# EAGLE board avoccado-avr-pcb-yolandi-panel (EAGLE 7.2.0), part 1 of 8
Avoccado-avr-yolandi Yolandi is the minified version of Avoccado-avr with less pins broken out and a footprint of less than one square inch for the PCB without peripherals.
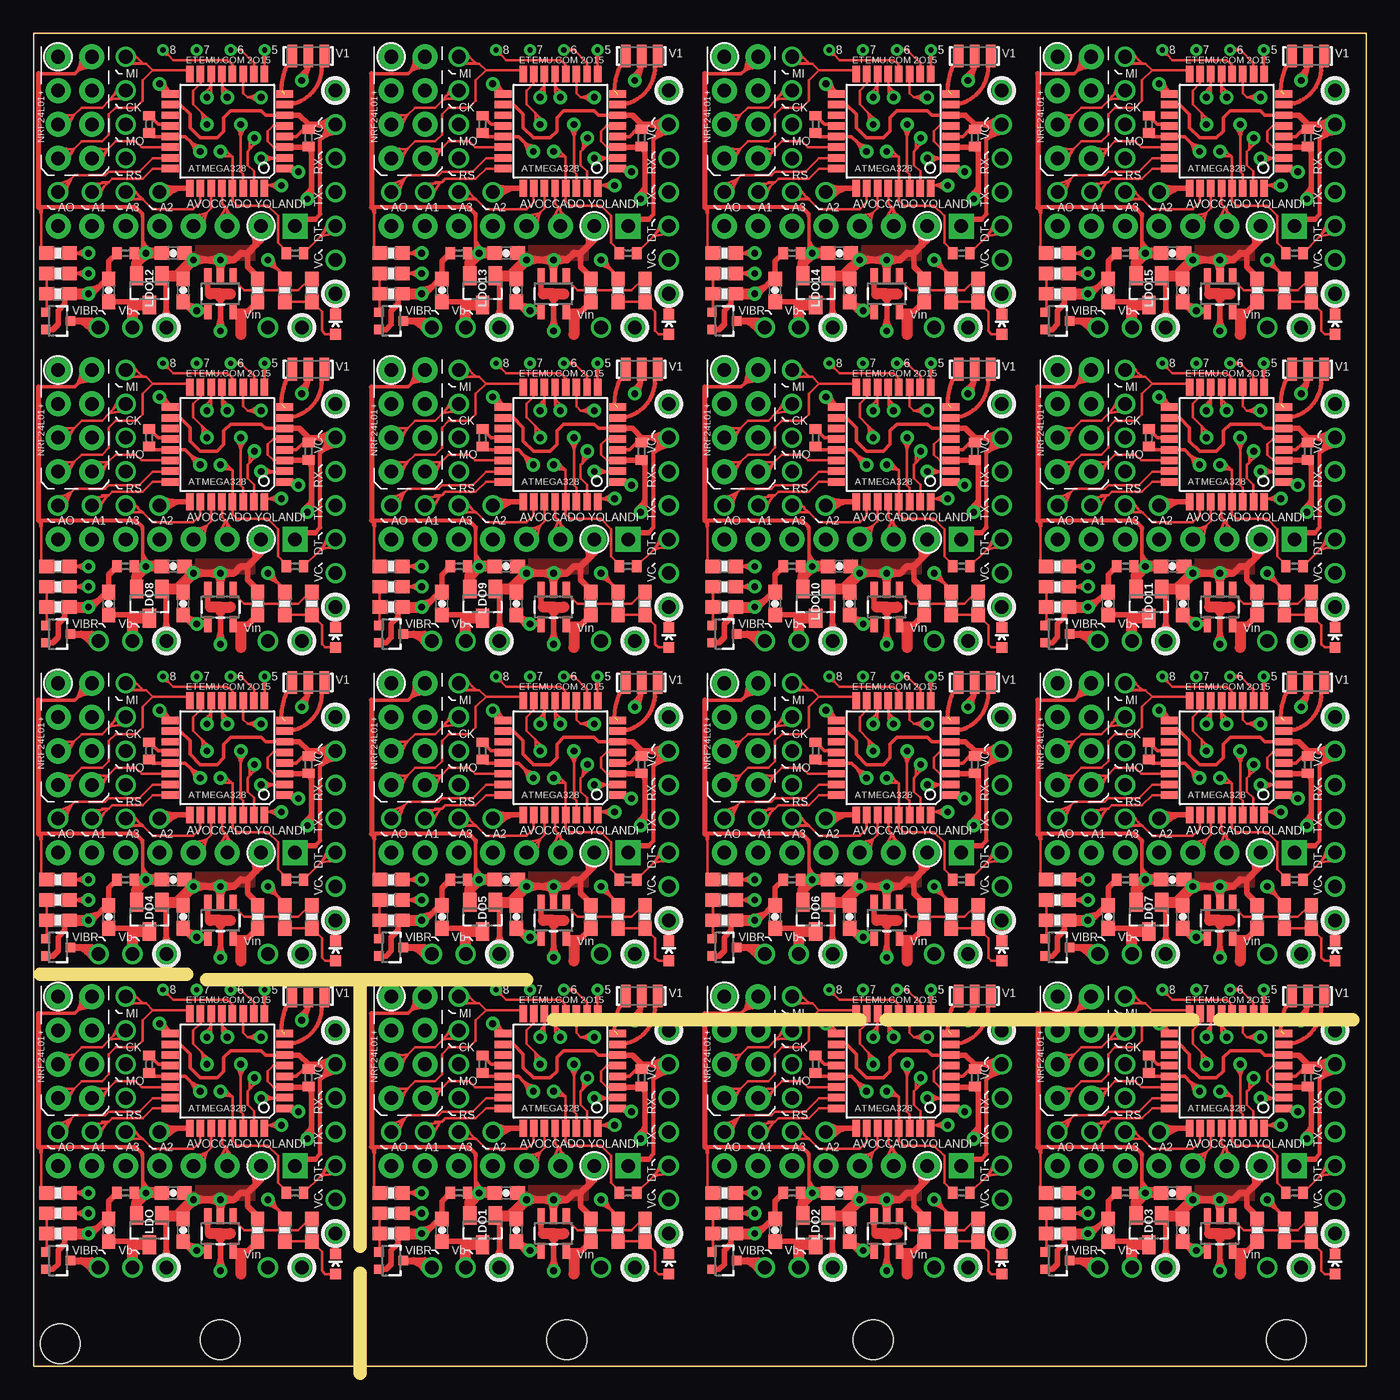
[diagram p0: board, top side]
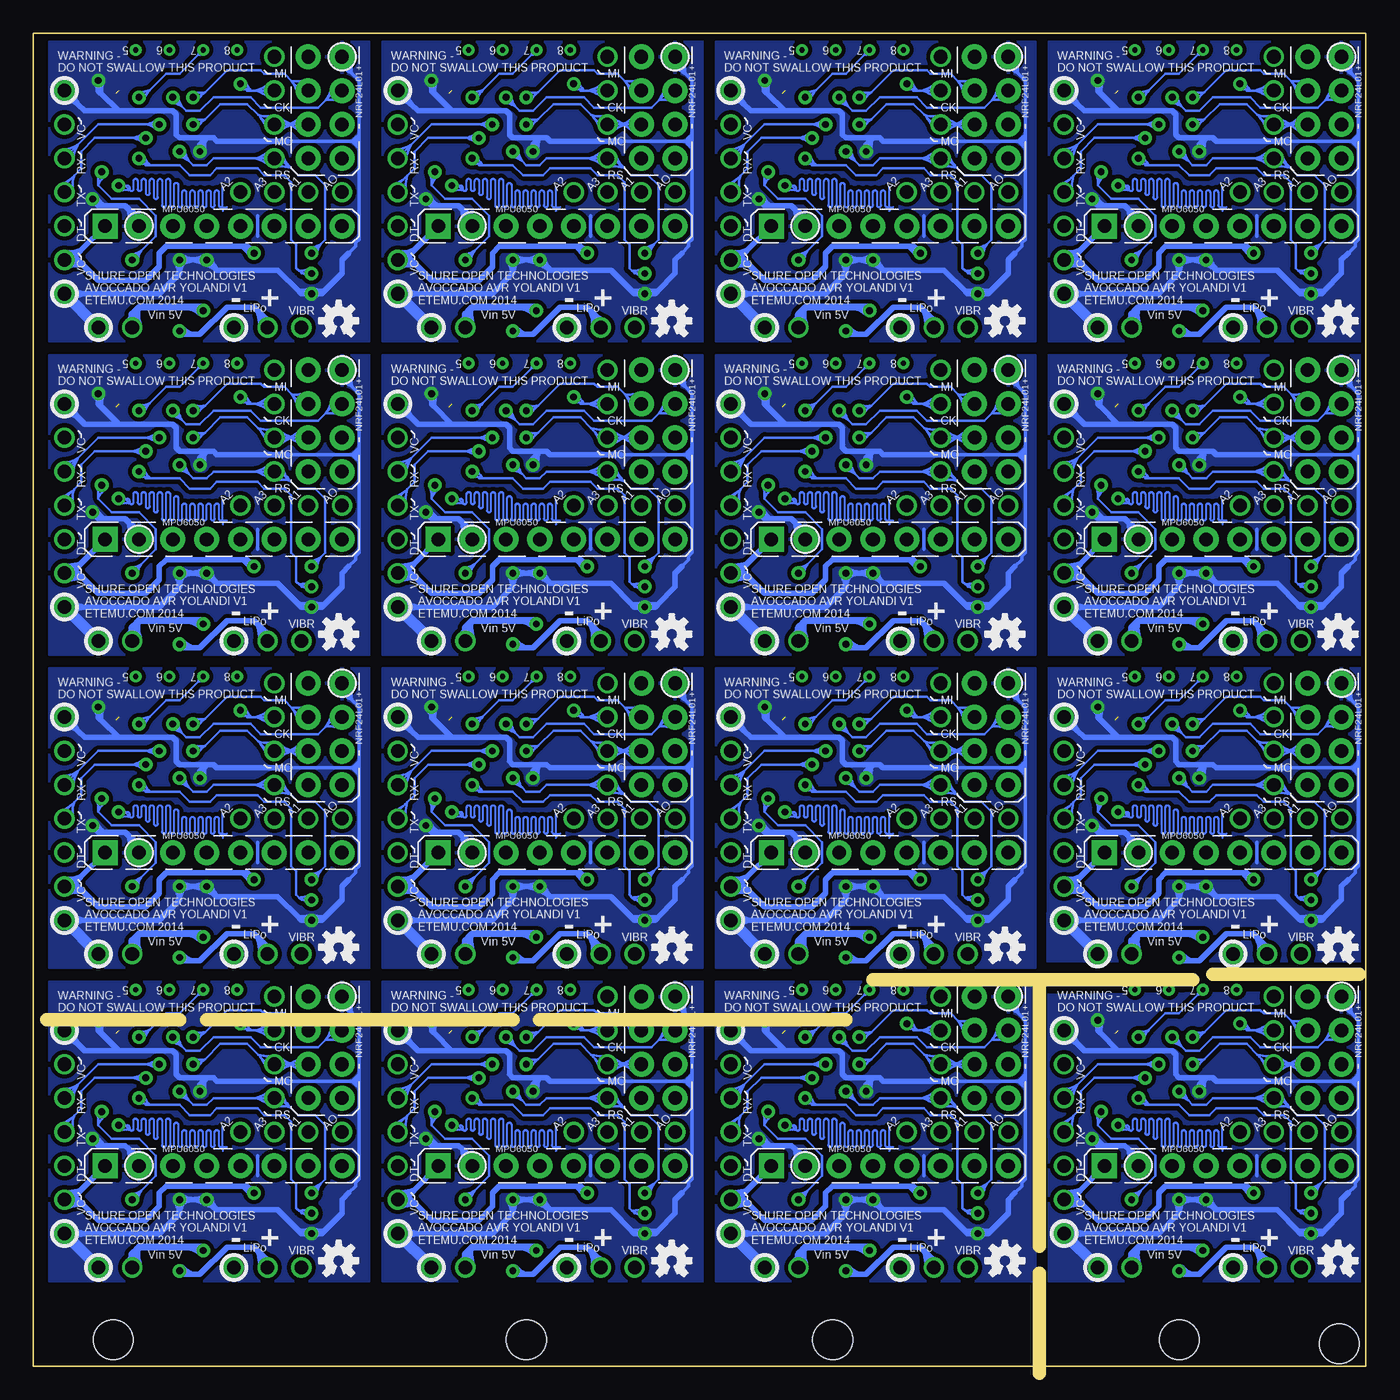
[diagram p1: board, bottom side, seen from below]

Size 100 x 100 mm. Coordinates in mm from the lower left corner, seen from the top.
Outline: 0,0 0,100 100,100 100,0 0,0
Copper layers (1*16): Top 0.035mm / dielectric 1.5mm / Bottom 0.035mm
Design rules "dirt_cheap_dirty_boards.v1 *": minimum track width 5mil, minimum drill 12mil, track to track 5mil, track to pad 5mil, pad to pad 5mil, via to via 5mil, smd to smd 0mil, copper to edge 10mil, drill to drill 10mil, minimum pad ring 10mil, minimum via ring 6mil, stop-mask expansion 0mil, vias tented up to drill 25mil, thermal gap 10mil
Net classes: 1 vcc: width 0.254 mm; 3 usbvcc: width 0.203 mm, drill 0.61 mm, clearance 0.152 mm
Holes 3 mm at 2,1.7 14,2 40,2 63,2 94,2
Milling: 8 lines

## Footprints (pad centres in the part's own frame; a part is rotated, then mirrored left to right if it is on the bottom)
TQFP32-08 = smd 1.27 x 0.559: 1 -4.293,2.8; 2 -4.293,2; 3 -4.293,1.2; 4 -4.293,0.4; 5 -4.293,-0.4; 6 -4.293,-1.2; 7 -4.293,-2; 8 -4.293,-2.8; 17 4.293,-2.8; 18 4.293,-2; 19 4.293,-1.2; 20 4.293,-0.4; 21 4.293,0.4; 22 4.293,1.2; 23 4.293,2; 24 4.293,2.8 | smd 0.559 x 1.27: 9 -2.8,-4.293; 10 -2,-4.293; 11 -1.2,-4.293; 12 -0.4,-4.293; 13 0.4,-4.293; 14 1.2,-4.293; 15 2,-4.293; 16 2.8,-4.293; 25 2.8,4.293; 26 2,4.293; 27 1.2,4.293; 28 0.4,4.293; 29 -0.4,4.293; 30 -1.2,4.293; 31 -2,4.293; 32 -2.8,4.293
C0402 = smd 0.7 x 0.9: 1 -0.65,0; 2 0.65,0
0603-CAP = smd 1.1 x 1: 1 -0.85,0; 2 0.85,0
LED-0603 = smd 0.8 x 0.8: A 0,-0.75; C 0,0.75
1X08_PIN1_NO_SILK = drill 1.016 pad 1.88 square: 1 0,0 | drill 1.016 pad 1.88: 2 2.54,0; 3 5.08,0; 4 7.62,0; 5 10.16,0; 6 12.7,0; 7 15.24,0; 8 17.78,0
1X02_NO_SILK = drill 1.016 pad 1.88: 1 0,0; 2 2.54,0
1X01NS-KIT = drill 1.016 pad 1.524: 1 0,0
SOT23 = smd 1 x 1.4: 1 -0.95,-1.1; 2 0.95,-1.1; 3 0,1.1
RESONATOR-SMD = smd 0.7 x 1.7: 1 -1.2,0; 2 0,0; 3 1.2,0
SOT323 = smd 0.7 x 0.7: 1 -0.65,-0.925; 2 0.65,-0.925; 3 0,0.925
0603-RES = smd 1.1 x 1: 1 -0.85,0; 2 0.85,0
TP_15TH = drill 0.381 pad 0.61: P$1 0,0
SOT23-5 = smd 0.55 x 1.2: 1 -0.95,-1.3; 2 0,-1.3; 3 0.95,-1.3; 4 0.95,1.3; 5 -0.95,1.3

## Placement (x,y rotation side)
AVR  ATMEGA328P  [TQFP32-08]  14.53,22.16 180 top
AVR1  ATMEGA328P  [TQFP32-08]  39.53,22.16 180 top
AVR2  ATMEGA328P  [TQFP32-08]  64.53,22.16 180 top
AVR3  ATMEGA328P  [TQFP32-08]  89.53,22.16 180 top
AVR4  ATMEGA328P  [TQFP32-08]  14.53,45.66 180 top
AVR5  ATMEGA328P  [TQFP32-08]  39.53,45.66 180 top
AVR6  ATMEGA328P  [TQFP32-08]  64.53,45.66 180 top
AVR7  ATMEGA328P  [TQFP32-08]  89.53,45.66 180 top
AVR8  ATMEGA328P  [TQFP32-08]  14.53,69.16 180 top
AVR9  ATMEGA328P  [TQFP32-08]  39.53,69.16 180 top
AVR10  ATMEGA328P  [TQFP32-08]  64.53,69.16 180 top
AVR11  ATMEGA328P  [TQFP32-08]  89.53,69.16 180 top
AVR12  ATMEGA328P  [TQFP32-08]  14.53,92.66 180 top
AVR13  ATMEGA328P  [TQFP32-08]  39.53,92.66 180 top
AVR14  ATMEGA328P  [TQFP32-08]  64.53,92.66 180 top
AVR15  ATMEGA328P  [TQFP32-08]  89.53,92.66 180 top
C1  0.1uF  [C0402]  8.69,22.66 90 top
C2  0.1uF  [C0402]  19.61,13.01 0 top
C3  0.1uF  [C0402]  20.63,21.65 90 top
C4  4.7uF  [0603-CAP]  11.23,10.22 90 top
C5  4.7uF  [0603-CAP]  5.64,10.22 90 top
C6  4.7uF  [0603-CAP]  10.47,13.01 0 top
C7  0.1uF  [C0402]  31.91,13.01 180 top
C8  0.1uF  [C0402]  45.63,21.65 90 top
C9  0.1uF  [C0402]  33.69,22.66 90 top
C10  0.1uF  [C0402]  6.91,13.01 180 top
C11  4.7uF  [0603-CAP]  36.23,10.22 90 top
C12  0.1uF  [C0402]  44.61,13.01 0 top
C13  4.7uF  [0603-CAP]  30.64,10.22 90 top
C14  4.7uF  [0603-CAP]  35.47,13.01 0 top
C15  0.1uF  [C0402]  56.91,13.01 180 top
C16  0.1uF  [C0402]  70.63,21.65 90 top
C17  0.1uF  [C0402]  58.69,22.66 90 top
C18  4.7uF  [0603-CAP]  61.23,10.22 90 top
C19  0.1uF  [C0402]  69.61,13.01 0 top
C20  4.7uF  [0603-CAP]  55.64,10.22 90 top
C21  4.7uF  [0603-CAP]  60.47,13.01 0 top
C22  0.1uF  [C0402]  81.91,13.01 180 top
C23  0.1uF  [C0402]  95.63,21.65 90 top
C24  0.1uF  [C0402]  83.69,22.66 90 top
C25  4.7uF  [0603-CAP]  86.23,10.22 90 top
C26  0.1uF  [C0402]  94.61,13.01 0 top
C27  4.7uF  [0603-CAP]  80.64,10.22 90 top
C28  4.7uF  [0603-CAP]  85.47,13.01 0 top
C29  0.1uF  [C0402]  6.91,36.51 180 top
C30  0.1uF  [C0402]  20.63,45.15 90 top
C31  0.1uF  [C0402]  8.69,46.16 90 top
C32  4.7uF  [0603-CAP]  11.23,33.72 90 top
C33  0.1uF  [C0402]  19.61,36.51 0 top
C34  4.7uF  [0603-CAP]  5.64,33.72 90 top
C35  4.7uF  [0603-CAP]  10.47,36.51 0 top
C36  0.1uF  [C0402]  31.91,36.51 180 top
C37  0.1uF  [C0402]  45.63,45.15 90 top
C38  0.1uF  [C0402]  33.69,46.16 90 top
C39  4.7uF  [0603-CAP]  36.23,33.72 90 top
C40  0.1uF  [C0402]  44.61,36.51 0 top
C41  4.7uF  [0603-CAP]  30.64,33.72 90 top
C42  4.7uF  [0603-CAP]  35.47,36.51 0 top
C43  0.1uF  [C0402]  56.91,36.51 180 top
C44  0.1uF  [C0402]  70.63,45.15 90 top
C45  0.1uF  [C0402]  58.69,46.16 90 top
C46  4.7uF  [0603-CAP]  61.23,33.72 90 top
C47  0.1uF  [C0402]  69.61,36.51 0 top
C48  4.7uF  [0603-CAP]  55.64,33.72 90 top
C49  4.7uF  [0603-CAP]  60.47,36.51 0 top
C50  0.1uF  [C0402]  81.91,36.51 180 top
C51  0.1uF  [C0402]  95.63,45.15 90 top
C52  0.1uF  [C0402]  83.69,46.16 90 top
C53  4.7uF  [0603-CAP]  86.23,33.72 90 top
C54  0.1uF  [C0402]  94.61,36.51 0 top
C55  4.7uF  [0603-CAP]  80.64,33.72 90 top
C56  4.7uF  [0603-CAP]  85.47,36.51 0 top
C57  0.1uF  [C0402]  6.91,60.01 180 top
C58  0.1uF  [C0402]  20.63,68.65 90 top
C59  0.1uF  [C0402]  8.69,69.66 90 top
C60  4.7uF  [0603-CAP]  11.23,57.22 90 top
C61  0.1uF  [C0402]  19.61,60.01 0 top
C62  4.7uF  [0603-CAP]  5.64,57.22 90 top
C63  4.7uF  [0603-CAP]  10.47,60.01 0 top
C64  0.1uF  [C0402]  31.91,60.01 180 top
C65  0.1uF  [C0402]  45.63,68.65 90 top
C66  0.1uF  [C0402]  33.69,69.66 90 top
C67  4.7uF  [0603-CAP]  36.23,57.22 90 top
C68  0.1uF  [C0402]  44.61,60.01 0 top
C69  4.7uF  [0603-CAP]  30.64,57.22 90 top
C70  4.7uF  [0603-CAP]  35.47,60.01 0 top
C71  0.1uF  [C0402]  56.91,60.01 180 top
C72  0.1uF  [C0402]  70.63,68.65 90 top
C73  0.1uF  [C0402]  58.69,69.66 90 top
C74  4.7uF  [0603-CAP]  61.23,57.22 90 top
C75  0.1uF  [C0402]  69.61,60.01 0 top
C76  4.7uF  [0603-CAP]  55.64,57.22 90 top
C77  4.7uF  [0603-CAP]  60.47,60.01 0 top
C78  0.1uF  [C0402]  81.91,60.01 180 top
C79  0.1uF  [C0402]  95.63,68.65 90 top
C80  0.1uF  [C0402]  83.69,69.66 90 top
C81  4.7uF  [0603-CAP]  86.23,57.22 90 top
C82  0.1uF  [C0402]  94.61,60.01 0 top
C83  4.7uF  [0603-CAP]  80.64,57.22 90 top
C84  4.7uF  [0603-CAP]  85.47,60.01 0 top
C85  0.1uF  [C0402]  6.91,83.51 180 top
C86  0.1uF  [C0402]  20.63,92.15 90 top
C87  0.1uF  [C0402]  8.69,93.16 90 top
C88  4.7uF  [0603-CAP]  11.23,80.72 90 top
C89  0.1uF  [C0402]  19.61,83.51 0 top
C90  4.7uF  [0603-CAP]  5.64,80.72 90 top
C91  4.7uF  [0603-CAP]  10.47,83.51 0 top
C92  0.1uF  [C0402]  31.91,83.51 180 top
C93  0.1uF  [C0402]  45.63,92.15 90 top
C94  0.1uF  [C0402]  33.69,93.16 90 top
C95  4.7uF  [0603-CAP]  36.23,80.72 90 top
C96  0.1uF  [C0402]  44.61,83.51 0 top
C97  4.7uF  [0603-CAP]  30.64,80.72 90 top
C98  4.7uF  [0603-CAP]  35.47,83.51 0 top
C99  0.1uF  [C0402]  56.91,83.51 180 top
C100  0.1uF  [C0402]  70.63,92.15 90 top
C101  0.1uF  [C0402]  58.69,93.16 90 top
C102  4.7uF  [0603-CAP]  61.23,80.72 90 top
C103  0.1uF  [C0402]  69.61,83.51 0 top
C104  4.7uF  [0603-CAP]  55.64,80.72 90 top
C105  4.7uF  [0603-CAP]  60.47,83.51 0 top
C106  0.1uF  [C0402]  81.91,83.51 180 top
C107  0.1uF  [C0402]  95.63,92.15 90 top
C108  0.1uF  [C0402]  83.69,93.16 90 top
C109  4.7uF  [0603-CAP]  86.23,80.72 90 top
C110  0.1uF  [C0402]  94.61,83.51 0 top
C111  4.7uF  [0603-CAP]  80.64,80.72 90 top
C112  4.7uF  [0603-CAP]  85.47,83.51 0 top
D1  LED  [LED-0603]  22.66,7.68 0 top
D2  LED  [LED-0603]  47.66,7.68 0 top
D3  LED  [LED-0603]  72.66,7.68 0 top
D4  LED  [LED-0603]  97.66,7.68 0 top
D5  LED  [LED-0603]  22.66,31.18 0 top
D6  LED  [LED-0603]  47.66,31.18 0 top
D7  LED  [LED-0603]  72.66,31.18 0 top
D8  LED  [LED-0603]  97.66,31.18 0 top
D9  LED  [LED-0603]  22.66,54.68 0 top
D10  LED  [LED-0603]  47.66,54.68 0 top
D11  LED  [LED-0603]  72.66,54.68 0 top
D12  LED  [LED-0603]  97.66,54.68 0 top
D13  LED  [LED-0603]  22.66,78.18 0 top
D14  LED  [LED-0603]  47.66,78.18 0 top
D15  LED  [LED-0603]  72.66,78.18 0 top
D16  LED  [LED-0603]  97.66,78.18 0 top
JP1  MPU6050  [1X08_PIN1_NO_SILK]  19.61,15.04 180 top
JP2  M021X02_NO_SILK  [1X02_NO_SILK]  1.83,27.74 0 top
JP3  M01NOSILK-KIT  [1X01NS-KIT]  22.66,25.2 0 top
JP4  MPU6050  [1X08_PIN1_NO_SILK]  44.61,15.04 180 top
JP5  M01NOSILK-KIT  [1X01NS-KIT]  47.66,9.96 0 top
JP6  M01NOSILK-KIT  [1X01NS-KIT]  22.66,9.96 0 top
JP7  M01NOSILK-KIT  [1X01NS-KIT]  47.66,20.12 0 top
JP8  M01NOSILK-KIT  [1X01NS-KIT]  22.66,20.12 0 top
JP9  M01NOSILK-KIT  [1X01NS-KIT]  22.66,17.58 0 top
JP10  M01NOSILK-KIT  [1X01NS-KIT]  22.66,15.04 0 top
JP11  M01NOSILK-KIT  [1X01NS-KIT]  22.66,22.66 0 top
JP12  M01NOSILK-KIT  [1X01NS-KIT]  6.91,27.74 0 top
JP13  M01NOSILK-KIT  [1X01NS-KIT]  6.91,25.2 0 top
JP14  M01NOSILK-KIT  [1X01NS-KIT]  6.91,22.66 0 top
JP15  M01NOSILK-KIT  [1X01NS-KIT]  6.91,20.12 0 top
JP16  M01NOSILK-KIT  [1X01NS-KIT]  47.66,17.58 0 top
JP17  M01NOSILK-KIT  [1X01NS-KIT]  17.58,7.42 0 top
JP18  M01NOSILK-KIT  [1X01NS-KIT]  22.66,12.5 0 top
JP19  M01NOSILK-KIT  [1X01NS-KIT]  1.83,17.58 90 top
JP20  M01NOSILK-KIT  [1X01NS-KIT]  4.37,17.58 90 top
JP21  M01NOSILK-KIT  [1X01NS-KIT]  9.45,17.58 90 top
JP22  M01NOSILK-KIT  [1X01NS-KIT]  6.91,17.58 90 top
JP23  M01NOSILK-KIT  [1X01NS-KIT]  4.88,7.42 0 top
JP24  M01NOSILK-KIT  [1X01NS-KIT]  7.42,7.42 0 top
JP25  M01NOSILK-KIT  [1X01NS-KIT]  9.96,7.42 0 top
JP26  M01NOSILK-KIT  [1X01NS-KIT]  20.12,7.42 0 top
JP27  M021X02_NO_SILK  [1X02_NO_SILK]  1.83,25.2 0 top
JP28  M021X02_NO_SILK  [1X02_NO_SILK]  1.83,22.66 0 top
JP29  M021X02_NO_SILK  [1X02_NO_SILK]  1.83,20.12 0 top
JP30  M01NOSILK-KIT  [1X01NS-KIT]  47.66,15.04 0 top
JP31  M01NOSILK-KIT  [1X01NS-KIT]  47.66,22.66 0 top
JP32  M01NOSILK-KIT  [1X01NS-KIT]  31.91,27.74 0 top
JP33  M01NOSILK-KIT  [1X01NS-KIT]  31.91,25.2 0 top
JP34  M01NOSILK-KIT  [1X01NS-KIT]  31.91,22.66 0 top
JP35  M01NOSILK-KIT  [1X01NS-KIT]  31.91,20.12 0 top
JP36  M01NOSILK-KIT  [1X01NS-KIT]  47.66,25.2 0 top
JP37  M01NOSILK-KIT  [1X01NS-KIT]  42.58,7.42 0 top
JP38  M01NOSILK-KIT  [1X01NS-KIT]  47.66,12.5 0 top
JP39  M01NOSILK-KIT  [1X01NS-KIT]  26.83,17.58 90 top
JP40  M01NOSILK-KIT  [1X01NS-KIT]  29.37,17.58 90 top
JP41  M01NOSILK-KIT  [1X01NS-KIT]  34.45,17.58 90 top
JP42  M01NOSILK-KIT  [1X01NS-KIT]  31.91,17.58 90 top
JP43  M01NOSILK-KIT  [1X01NS-KIT]  32.42,7.42 0 top
JP44  M01NOSILK-KIT  [1X01NS-KIT]  29.88,7.42 0 top
JP45  M01NOSILK-KIT  [1X01NS-KIT]  34.96,7.42 0 top
JP46  M01NOSILK-KIT  [1X01NS-KIT]  45.12,7.42 0 top
JP47  M021X02_NO_SILK  [1X02_NO_SILK]  26.83,27.74 0 top
JP48  M021X02_NO_SILK  [1X02_NO_SILK]  26.83,25.2 0 top
JP49  M021X02_NO_SILK  [1X02_NO_SILK]  26.83,22.66 0 top
JP50  M021X02_NO_SILK  [1X02_NO_SILK]  26.83,20.12 0 top
JP51  MPU6050  [1X08_PIN1_NO_SILK]  69.61,15.04 180 top
JP52  M01NOSILK-KIT  [1X01NS-KIT]  72.66,9.96 0 top
JP53  M01NOSILK-KIT  [1X01NS-KIT]  72.66,20.12 0 top
JP54  M01NOSILK-KIT  [1X01NS-KIT]  72.66,17.58 0 top
JP55  M01NOSILK-KIT  [1X01NS-KIT]  72.66,15.04 0 top
JP56  M01NOSILK-KIT  [1X01NS-KIT]  72.66,22.66 0 top
JP57  M01NOSILK-KIT  [1X01NS-KIT]  56.91,27.74 0 top
JP58  M01NOSILK-KIT  [1X01NS-KIT]  56.91,25.2 0 top
JP59  M01NOSILK-KIT  [1X01NS-KIT]  56.91,22.66 0 top
JP60  M01NOSILK-KIT  [1X01NS-KIT]  56.91,20.12 0 top
JP61  M01NOSILK-KIT  [1X01NS-KIT]  72.66,25.2 0 top
JP62  M01NOSILK-KIT  [1X01NS-KIT]  67.58,7.42 0 top
JP63  M01NOSILK-KIT  [1X01NS-KIT]  72.66,12.5 0 top
JP64  M01NOSILK-KIT  [1X01NS-KIT]  51.83,17.58 90 top
JP65  M01NOSILK-KIT  [1X01NS-KIT]  54.37,17.58 90 top
JP66  M01NOSILK-KIT  [1X01NS-KIT]  59.45,17.58 90 top
JP67  M01NOSILK-KIT  [1X01NS-KIT]  56.91,17.58 90 top
JP68  M01NOSILK-KIT  [1X01NS-KIT]  57.42,7.42 0 top
JP69  M01NOSILK-KIT  [1X01NS-KIT]  54.88,7.42 0 top
JP70  M01NOSILK-KIT  [1X01NS-KIT]  59.96,7.42 0 top
JP71  M01NOSILK-KIT  [1X01NS-KIT]  70.12,7.42 0 top
JP72  M021X02_NO_SILK  [1X02_NO_SILK]  51.83,27.74 0 top
JP73  M021X02_NO_SILK  [1X02_NO_SILK]  51.83,25.2 0 top
JP74  M021X02_NO_SILK  [1X02_NO_SILK]  51.83,22.66 0 top
JP75  M021X02_NO_SILK  [1X02_NO_SILK]  51.83,20.12 0 top
JP76  MPU6050  [1X08_PIN1_NO_SILK]  94.61,15.04 180 top
JP77  M01NOSILK-KIT  [1X01NS-KIT]  97.66,9.96 0 top
JP78  M01NOSILK-KIT  [1X01NS-KIT]  97.66,20.12 0 top
JP79  M01NOSILK-KIT  [1X01NS-KIT]  97.66,17.58 0 top
JP80  M01NOSILK-KIT  [1X01NS-KIT]  97.66,15.04 0 top
JP81  M01NOSILK-KIT  [1X01NS-KIT]  97.66,22.66 0 top
JP82  M01NOSILK-KIT  [1X01NS-KIT]  81.91,27.74 0 top
JP83  M01NOSILK-KIT  [1X01NS-KIT]  81.91,25.2 0 top
JP84  M01NOSILK-KIT  [1X01NS-KIT]  81.91,22.66 0 top
JP85  M01NOSILK-KIT  [1X01NS-KIT]  81.91,20.12 0 top
JP86  M01NOSILK-KIT  [1X01NS-KIT]  97.66,25.2 0 top
JP87  M01NOSILK-KIT  [1X01NS-KIT]  92.58,7.42 0 top
JP88  M01NOSILK-KIT  [1X01NS-KIT]  97.66,12.5 0 top
JP89  M01NOSILK-KIT  [1X01NS-KIT]  76.83,17.58 90 top
JP90  M01NOSILK-KIT  [1X01NS-KIT]  79.37,17.58 90 top
JP91  M01NOSILK-KIT  [1X01NS-KIT]  84.45,17.58 90 top
JP92  M01NOSILK-KIT  [1X01NS-KIT]  81.91,17.58 90 top
JP93  M01NOSILK-KIT  [1X01NS-KIT]  82.42,7.42 0 top
JP94  M01NOSILK-KIT  [1X01NS-KIT]  79.88,7.42 0 top
JP95  M01NOSILK-KIT  [1X01NS-KIT]  84.96,7.42 0 top
JP96  M01NOSILK-KIT  [1X01NS-KIT]  95.12,7.42 0 top
JP97  M021X02_NO_SILK  [1X02_NO_SILK]  76.83,27.74 0 top
JP98  M021X02_NO_SILK  [1X02_NO_SILK]  76.83,25.2 0 top
JP99  M021X02_NO_SILK  [1X02_NO_SILK]  76.83,22.66 0 top
JP100  M021X02_NO_SILK  [1X02_NO_SILK]  76.83,20.12 0 top
JP101  MPU6050  [1X08_PIN1_NO_SILK]  19.61,38.54 180 top
JP102  M01NOSILK-KIT  [1X01NS-KIT]  22.66,33.46 0 top
JP103  M01NOSILK-KIT  [1X01NS-KIT]  22.66,43.62 0 top
JP104  M01NOSILK-KIT  [1X01NS-KIT]  22.66,41.08 0 top
JP105  M01NOSILK-KIT  [1X01NS-KIT]  22.66,38.54 0 top
JP106  M01NOSILK-KIT  [1X01NS-KIT]  22.66,46.16 0 top
JP107  M01NOSILK-KIT  [1X01NS-KIT]  6.91,51.24 0 top
JP108  M01NOSILK-KIT  [1X01NS-KIT]  6.91,48.7 0 top
JP109  M01NOSILK-KIT  [1X01NS-KIT]  6.91,46.16 0 top
JP110  M01NOSILK-KIT  [1X01NS-KIT]  6.91,43.62 0 top
JP111  M01NOSILK-KIT  [1X01NS-KIT]  22.66,48.7 0 top
JP112  M01NOSILK-KIT  [1X01NS-KIT]  17.58,30.92 0 top
JP113  M01NOSILK-KIT  [1X01NS-KIT]  22.66,36 0 top
JP114  M01NOSILK-KIT  [1X01NS-KIT]  1.83,41.08 90 top
JP115  M01NOSILK-KIT  [1X01NS-KIT]  4.37,41.08 90 top
JP116  M01NOSILK-KIT  [1X01NS-KIT]  9.45,41.08 90 top
JP117  M01NOSILK-KIT  [1X01NS-KIT]  6.91,41.08 90 top
JP118  M01NOSILK-KIT  [1X01NS-KIT]  7.42,30.92 0 top
JP119  M01NOSILK-KIT  [1X01NS-KIT]  4.88,30.92 0 top
JP120  M01NOSILK-KIT  [1X01NS-KIT]  9.96,30.92 0 top
JP121  M01NOSILK-KIT  [1X01NS-KIT]  20.12,30.92 0 top
JP122  M021X02_NO_SILK  [1X02_NO_SILK]  1.83,51.24 0 top
JP123  M021X02_NO_SILK  [1X02_NO_SILK]  1.83,48.7 0 top
JP124  M021X02_NO_SILK  [1X02_NO_SILK]  1.83,46.16 0 top
JP125  M021X02_NO_SILK  [1X02_NO_SILK]  1.83,43.62 0 top
JP126  MPU6050  [1X08_PIN1_NO_SILK]  44.61,38.54 180 top
JP127  M01NOSILK-KIT  [1X01NS-KIT]  47.66,33.46 0 top
JP128  M01NOSILK-KIT  [1X01NS-KIT]  47.66,43.62 0 top
JP129  M01NOSILK-KIT  [1X01NS-KIT]  47.66,41.08 0 top
JP130  M01NOSILK-KIT  [1X01NS-KIT]  47.66,38.54 0 top
JP131  M01NOSILK-KIT  [1X01NS-KIT]  47.66,46.16 0 top
JP132  M01NOSILK-KIT  [1X01NS-KIT]  31.91,51.24 0 top
JP133  M01NOSILK-KIT  [1X01NS-KIT]  31.91,48.7 0 top
JP134  M01NOSILK-KIT  [1X01NS-KIT]  31.91,46.16 0 top
JP135  M01NOSILK-KIT  [1X01NS-KIT]  31.91,43.62 0 top
JP136  M01NOSILK-KIT  [1X01NS-KIT]  47.66,48.7 0 top
JP137  M01NOSILK-KIT  [1X01NS-KIT]  42.58,30.92 0 top
JP138  M01NOSILK-KIT  [1X01NS-KIT]  47.66,36 0 top
JP139  M01NOSILK-KIT  [1X01NS-KIT]  26.83,41.08 90 top
JP140  M01NOSILK-KIT  [1X01NS-KIT]  29.37,41.08 90 top
JP141  M01NOSILK-KIT  [1X01NS-KIT]  34.45,41.08 90 top
JP142  M01NOSILK-KIT  [1X01NS-KIT]  31.91,41.08 90 top
JP143  M01NOSILK-KIT  [1X01NS-KIT]  32.42,30.92 0 top
JP144  M01NOSILK-KIT  [1X01NS-KIT]  29.88,30.92 0 top
JP145  M01NOSILK-KIT  [1X01NS-KIT]  34.96,30.92 0 top
JP146  M01NOSILK-KIT  [1X01NS-KIT]  45.12,30.92 0 top
JP147  M021X02_NO_SILK  [1X02_NO_SILK]  26.83,51.24 0 top
JP148  M021X02_NO_SILK  [1X02_NO_SILK]  26.83,48.7 0 top
JP149  M021X02_NO_SILK  [1X02_NO_SILK]  26.83,46.16 0 top
JP150  M021X02_NO_SILK  [1X02_NO_SILK]  26.83,43.62 0 top
JP151  MPU6050  [1X08_PIN1_NO_SILK]  69.61,38.54 180 top
JP152  M01NOSILK-KIT  [1X01NS-KIT]  72.66,33.46 0 top
JP153  M01NOSILK-KIT  [1X01NS-KIT]  72.66,43.62 0 top
JP154  M01NOSILK-KIT  [1X01NS-KIT]  72.66,41.08 0 top
JP155  M01NOSILK-KIT  [1X01NS-KIT]  72.66,38.54 0 top
JP156  M01NOSILK-KIT  [1X01NS-KIT]  72.66,46.16 0 top
JP157  M01NOSILK-KIT  [1X01NS-KIT]  56.91,51.24 0 top
JP158  M01NOSILK-KIT  [1X01NS-KIT]  56.91,48.7 0 top
JP159  M01NOSILK-KIT  [1X01NS-KIT]  56.91,46.16 0 top
JP160  M01NOSILK-KIT  [1X01NS-KIT]  56.91,43.62 0 top
JP161  M01NOSILK-KIT  [1X01NS-KIT]  72.66,48.7 0 top
JP162  M01NOSILK-KIT  [1X01NS-KIT]  67.58,30.92 0 top
JP163  M01NOSILK-KIT  [1X01NS-KIT]  72.66,36 0 top
JP164  M01NOSILK-KIT  [1X01NS-KIT]  51.83,41.08 90 top
JP165  M01NOSILK-KIT  [1X01NS-KIT]  54.37,41.08 90 top
JP166  M01NOSILK-KIT  [1X01NS-KIT]  59.45,41.08 90 top
JP167  M01NOSILK-KIT  [1X01NS-KIT]  56.91,41.08 90 top
JP168  M01NOSILK-KIT  [1X01NS-KIT]  57.42,30.92 0 top
JP169  M01NOSILK-KIT  [1X01NS-KIT]  54.88,30.92 0 top
JP170  M01NOSILK-KIT  [1X01NS-KIT]  59.96,30.92 0 top
JP171  M01NOSILK-KIT  [1X01NS-KIT]  70.12,30.92 0 top
JP172  M021X02_NO_SILK  [1X02_NO_SILK]  51.83,51.24 0 top
JP173  M021X02_NO_SILK  [1X02_NO_SILK]  51.83,48.7 0 top
JP174  M021X02_NO_SILK  [1X02_NO_SILK]  51.83,46.16 0 top
JP175  M021X02_NO_SILK  [1X02_NO_SILK]  51.83,43.62 0 top
JP176  MPU6050  [1X08_PIN1_NO_SILK]  94.61,38.54 180 top
JP177  M01NOSILK-KIT  [1X01NS-KIT]  97.66,33.46 0 top
JP178  M01NOSILK-KIT  [1X01NS-KIT]  97.66,43.62 0 top
JP179  M01NOSILK-KIT  [1X01NS-KIT]  97.66,41.08 0 top
JP180  M01NOSILK-KIT  [1X01NS-KIT]  97.66,38.54 0 top
JP181  M01NOSILK-KIT  [1X01NS-KIT]  97.66,46.16 0 top
JP182  M01NOSILK-KIT  [1X01NS-KIT]  81.91,51.24 0 top
JP183  M01NOSILK-KIT  [1X01NS-KIT]  81.91,48.7 0 top
JP184  M01NOSILK-KIT  [1X01NS-KIT]  81.91,46.16 0 top
JP185  M01NOSILK-KIT  [1X01NS-KIT]  81.91,43.62 0 top
JP186  M01NOSILK-KIT  [1X01NS-KIT]  97.66,48.7 0 top
JP187  M01NOSILK-KIT  [1X01NS-KIT]  92.58,30.92 0 top
JP188  M01NOSILK-KIT  [1X01NS-KIT]  97.66,36 0 top
JP189  M01NOSILK-KIT  [1X01NS-KIT]  76.83,41.08 90 top
JP190  M01NOSILK-KIT  [1X01NS-KIT]  79.37,41.08 90 top
JP191  M01NOSILK-KIT  [1X01NS-KIT]  84.45,41.08 90 top
JP192  M01NOSILK-KIT  [1X01NS-KIT]  81.91,41.08 90 top
JP193  M01NOSILK-KIT  [1X01NS-KIT]  82.42,30.92 0 top
JP194  M01NOSILK-KIT  [1X01NS-KIT]  79.88,30.92 0 top
JP195  M01NOSILK-KIT  [1X01NS-KIT]  84.96,30.92 0 top
JP196  M01NOSILK-KIT  [1X01NS-KIT]  95.12,30.92 0 top
JP197  M021X02_NO_SILK  [1X02_NO_SILK]  76.83,51.24 0 top
JP198  M021X02_NO_SILK  [1X02_NO_SILK]  76.83,48.7 0 top
JP199  M021X02_NO_SILK  [1X02_NO_SILK]  76.83,46.16 0 top
JP200  M021X02_NO_SILK  [1X02_NO_SILK]  76.83,43.62 0 top
JP201  MPU6050  [1X08_PIN1_NO_SILK]  19.61,62.04 180 top
JP202  M01NOSILK-KIT  [1X01NS-KIT]  22.66,56.96 0 top
JP203  M01NOSILK-KIT  [1X01NS-KIT]  22.66,67.12 0 top
JP204  M01NOSILK-KIT  [1X01NS-KIT]  22.66,64.58 0 top
JP205  M01NOSILK-KIT  [1X01NS-KIT]  22.66,62.04 0 top
JP206  M01NOSILK-KIT  [1X01NS-KIT]  22.66,69.66 0 top
JP207  M01NOSILK-KIT  [1X01NS-KIT]  6.91,74.74 0 top
JP208  M01NOSILK-KIT  [1X01NS-KIT]  6.91,72.2 0 top
JP209  M01NOSILK-KIT  [1X01NS-KIT]  6.91,69.66 0 top
JP210  M01NOSILK-KIT  [1X01NS-KIT]  6.91,67.12 0 top
JP211  M01NOSILK-KIT  [1X01NS-KIT]  22.66,72.2 0 top
JP212  M01NOSILK-KIT  [1X01NS-KIT]  17.58,54.42 0 top
JP213  M01NOSILK-KIT  [1X01NS-KIT]  22.66,59.5 0 top
JP214  M01NOSILK-KIT  [1X01NS-KIT]  1.83,64.58 90 top
JP215  M01NOSILK-KIT  [1X01NS-KIT]  4.37,64.58 90 top
JP216  M01NOSILK-KIT  [1X01NS-KIT]  9.45,64.58 90 top
JP217  M01NOSILK-KIT  [1X01NS-KIT]  6.91,64.58 90 top
JP218  M01NOSILK-KIT  [1X01NS-KIT]  7.42,54.42 0 top
JP219  M01NOSILK-KIT  [1X01NS-KIT]  4.88,54.42 0 top
JP220  M01NOSILK-KIT  [1X01NS-KIT]  9.96,54.42 0 top
JP221  M01NOSILK-KIT  [1X01NS-KIT]  20.12,54.42 0 top
JP222  M021X02_NO_SILK  [1X02_NO_SILK]  1.83,74.74 0 top
JP223  M021X02_NO_SILK  [1X02_NO_SILK]  1.83,72.2 0 top
JP224  M021X02_NO_SILK  [1X02_NO_SILK]  1.83,69.66 0 top
JP225  M021X02_NO_SILK  [1X02_NO_SILK]  1.83,67.12 0 top
JP226  MPU6050  [1X08_PIN1_NO_SILK]  44.61,62.04 180 top
JP227  M01NOSILK-KIT  [1X01NS-KIT]  47.66,56.96 0 top
JP228  M01NOSILK-KIT  [1X01NS-KIT]  47.66,67.12 0 top
JP229  M01NOSILK-KIT  [1X01NS-KIT]  47.66,64.58 0 top
JP230  M01NOSILK-KIT  [1X01NS-KIT]  47.66,62.04 0 top
JP231  M01NOSILK-KIT  [1X01NS-KIT]  47.66,69.66 0 top
JP232  M01NOSILK-KIT  [1X01NS-KIT]  31.91,74.74 0 top
JP233  M01NOSILK-KIT  [1X01NS-KIT]  31.91,72.2 0 top
JP234  M01NOSILK-KIT  [1X01NS-KIT]  31.91,69.66 0 top
JP235  M01NOSILK-KIT  [1X01NS-KIT]  31.91,67.12 0 top
JP236  M01NOSILK-KIT  [1X01NS-KIT]  47.66,72.2 0 top
JP237  M01NOSILK-KIT  [1X01NS-KIT]  42.58,54.42 0 top
JP238  M01NOSILK-KIT  [1X01NS-KIT]  47.66,59.5 0 top
JP239  M01NOSILK-KIT  [1X01NS-KIT]  26.83,64.58 90 top
JP240  M01NOSILK-KIT  [1X01NS-KIT]  29.37,64.58 90 top
JP241  M01NOSILK-KIT  [1X01NS-KIT]  34.45,64.58 90 top
JP242  M01NOSILK-KIT  [1X01NS-KIT]  31.91,64.58 90 top
JP243  M01NOSILK-KIT  [1X01NS-KIT]  32.42,54.42 0 top
JP244  M01NOSILK-KIT  [1X01NS-KIT]  29.88,54.42 0 top
JP245  M01NOSILK-KIT  [1X01NS-KIT]  34.96,54.42 0 top
JP246  M01NOSILK-KIT  [1X01NS-KIT]  45.12,54.42 0 top
JP247  M021X02_NO_SILK  [1X02_NO_SILK]  26.83,74.74 0 top
JP248  M021X02_NO_SILK  [1X02_NO_SILK]  26.83,72.2 0 top
JP249  M021X02_NO_SILK  [1X02_NO_SILK]  26.83,69.66 0 top
JP250  M021X02_NO_SILK  [1X02_NO_SILK]  26.83,67.12 0 top
JP251  MPU6050  [1X08_PIN1_NO_SILK]  69.61,62.04 180 top
JP252  M01NOSILK-KIT  [1X01NS-KIT]  72.66,56.96 0 top
JP253  M01NOSILK-KIT  [1X01NS-KIT]  72.66,67.12 0 top
JP254  M01NOSILK-KIT  [1X01NS-KIT]  72.66,64.58 0 top
JP255  M01NOSILK-KIT  [1X01NS-KIT]  72.66,62.04 0 top
JP256  M01NOSILK-KIT  [1X01NS-KIT]  72.66,69.66 0 top
JP257  M01NOSILK-KIT  [1X01NS-KIT]  56.91,74.74 0 top
JP258  M01NOSILK-KIT  [1X01NS-KIT]  56.91,72.2 0 top
JP259  M01NOSILK-KIT  [1X01NS-KIT]  56.91,69.66 0 top
JP260  M01NOSILK-KIT  [1X01NS-KIT]  56.91,67.12 0 top
JP261  M01NOSILK-KIT  [1X01NS-KIT]  72.66,72.2 0 top
JP262  M01NOSILK-KIT  [1X01NS-KIT]  67.58,54.42 0 top
JP263  M01NOSILK-KIT  [1X01NS-KIT]  72.66,59.5 0 top
JP264  M01NOSILK-KIT  [1X01NS-KIT]  51.83,64.58 90 top
JP265  M01NOSILK-KIT  [1X01NS-KIT]  54.37,64.58 90 top
JP266  M01NOSILK-KIT  [1X01NS-KIT]  59.45,64.58 90 top
JP267  M01NOSILK-KIT  [1X01NS-KIT]  56.91,64.58 90 top
JP268  M01NOSILK-KIT  [1X01NS-KIT]  57.42,54.42 0 top
JP269  M01NOSILK-KIT  [1X01NS-KIT]  54.88,54.42 0 top
JP270  M01NOSILK-KIT  [1X01NS-KIT]  59.96,54.42 0 top
JP271  M01NOSILK-KIT  [1X01NS-KIT]  70.12,54.42 0 top
JP272  M021X02_NO_SILK  [1X02_NO_SILK]  51.83,74.74 0 top
JP273  M021X02_NO_SILK  [1X02_NO_SILK]  51.83,72.2 0 top
JP274  M021X02_NO_SILK  [1X02_NO_SILK]  51.83,69.66 0 top
JP275  M021X02_NO_SILK  [1X02_NO_SILK]  51.83,67.12 0 top
JP276  MPU6050  [1X08_PIN1_NO_SILK]  94.61,62.04 180 top
JP277  M01NOSILK-KIT  [1X01NS-KIT]  97.66,56.96 0 top
JP278  M01NOSILK-KIT  [1X01NS-KIT]  97.66,67.12 0 top
JP279  M01NOSILK-KIT  [1X01NS-KIT]  97.66,64.58 0 top
JP280  M01NOSILK-KIT  [1X01NS-KIT]  97.66,62.04 0 top
JP281  M01NOSILK-KIT  [1X01NS-KIT]  97.66,69.66 0 top
JP282  M01NOSILK-KIT  [1X01NS-KIT]  81.91,74.74 0 top
JP283  M01NOSILK-KIT  [1X01NS-KIT]  81.91,72.2 0 top
JP284  M01NOSILK-KIT  [1X01NS-KIT]  81.91,69.66 0 top
JP285  M01NOSILK-KIT  [1X01NS-KIT]  81.91,67.12 0 top
JP286  M01NOSILK-KIT  [1X01NS-KIT]  97.66,72.2 0 top
JP287  M01NOSILK-KIT  [1X01NS-KIT]  92.58,54.42 0 top
JP288  M01NOSILK-KIT  [1X01NS-KIT]  97.66,59.5 0 top
JP289  M01NOSILK-KIT  [1X01NS-KIT]  76.83,64.58 90 top
JP290  M01NOSILK-KIT  [1X01NS-KIT]  79.37,64.58 90 top
JP291  M01NOSILK-KIT  [1X01NS-KIT]  84.45,64.58 90 top
JP292  M01NOSILK-KIT  [1X01NS-KIT]  81.91,64.58 90 top
JP293  M01NOSILK-KIT  [1X01NS-KIT]  82.42,54.42 0 top
JP294  M01NOSILK-KIT  [1X01NS-KIT]  79.88,54.42 0 top
JP295  M01NOSILK-KIT  [1X01NS-KIT]  84.96,54.42 0 top
JP296  M01NOSILK-KIT  [1X01NS-KIT]  95.12,54.42 0 top
JP297  M021X02_NO_SILK  [1X02_NO_SILK]  76.83,74.74 0 top
JP298  M021X02_NO_SILK  [1X02_NO_SILK]  76.83,72.2 0 top
JP299  M021X02_NO_SILK  [1X02_NO_SILK]  76.83,69.66 0 top
JP300  M021X02_NO_SILK  [1X02_NO_SILK]  76.83,67.12 0 top
JP301  MPU6050  [1X08_PIN1_NO_SILK]  19.61,85.54 180 top
JP302  M01NOSILK-KIT  [1X01NS-KIT]  22.66,80.46 0 top
JP303  M01NOSILK-KIT  [1X01NS-KIT]  22.66,90.62 0 top
JP304  M01NOSILK-KIT  [1X01NS-KIT]  22.66,88.08 0 top
JP305  M01NOSILK-KIT  [1X01NS-KIT]  22.66,85.54 0 top
JP306  M01NOSILK-KIT  [1X01NS-KIT]  22.66,93.16 0 top
JP307  M01NOSILK-KIT  [1X01NS-KIT]  6.91,98.24 0 top
JP308  M01NOSILK-KIT  [1X01NS-KIT]  6.91,95.7 0 top
JP309  M01NOSILK-KIT  [1X01NS-KIT]  6.91,93.16 0 top
JP310  M01NOSILK-KIT  [1X01NS-KIT]  6.91,90.62 0 top
JP311  M01NOSILK-KIT  [1X01NS-KIT]  22.66,95.7 0 top
JP312  M01NOSILK-KIT  [1X01NS-KIT]  17.58,77.92 0 top
JP313  M01NOSILK-KIT  [1X01NS-KIT]  22.66,83 0 top
JP314  M01NOSILK-KIT  [1X01NS-KIT]  1.83,88.08 90 top
JP315  M01NOSILK-KIT  [1X01NS-KIT]  4.37,88.08 90 top
JP316  M01NOSILK-KIT  [1X01NS-KIT]  9.45,88.08 90 top
JP317  M01NOSILK-KIT  [1X01NS-KIT]  6.91,88.08 90 top
JP318  M01NOSILK-KIT  [1X01NS-KIT]  7.42,77.92 0 top
JP319  M01NOSILK-KIT  [1X01NS-KIT]  4.88,77.92 0 top
JP320  M01NOSILK-KIT  [1X01NS-KIT]  9.96,77.92 0 top
JP321  M01NOSILK-KIT  [1X01NS-KIT]  20.12,77.92 0 top
JP322  M021X02_NO_SILK  [1X02_NO_SILK]  1.83,98.24 0 top
JP323  M021X02_NO_SILK  [1X02_NO_SILK]  1.83,95.7 0 top
JP324  M021X02_NO_SILK  [1X02_NO_SILK]  1.83,93.16 0 top
JP325  M021X02_NO_SILK  [1X02_NO_SILK]  1.83,90.62 0 top
JP326  MPU6050  [1X08_PIN1_NO_SILK]  44.61,85.54 180 top
JP327  M01NOSILK-KIT  [1X01NS-KIT]  47.66,80.46 0 top
JP328  M01NOSILK-KIT  [1X01NS-KIT]  47.66,90.62 0 top
JP329  M01NOSILK-KIT  [1X01NS-KIT]  47.66,88.08 0 top
JP330  M01NOSILK-KIT  [1X01NS-KIT]  47.66,85.54 0 top
JP331  M01NOSILK-KIT  [1X01NS-KIT]  47.66,93.16 0 top
JP332  M01NOSILK-KIT  [1X01NS-KIT]  31.91,98.24 0 top
JP333  M01NOSILK-KIT  [1X01NS-KIT]  31.91,95.7 0 top
JP334  M01NOSILK-KIT  [1X01NS-KIT]  31.91,93.16 0 top
JP335  M01NOSILK-KIT  [1X01NS-KIT]  31.91,90.62 0 top
JP336  M01NOSILK-KIT  [1X01NS-KIT]  47.66,95.7 0 top
JP337  M01NOSILK-KIT  [1X01NS-KIT]  42.58,77.92 0 top
JP338  M01NOSILK-KIT  [1X01NS-KIT]  47.66,83 0 top
JP339  M01NOSILK-KIT  [1X01NS-KIT]  26.83,88.08 90 top
JP340  M01NOSILK-KIT  [1X01NS-KIT]  29.37,88.08 90 top
JP341  M01NOSILK-KIT  [1X01NS-KIT]  34.45,88.08 90 top
JP342  M01NOSILK-KIT  [1X01NS-KIT]  31.91,88.08 90 top
JP343  M01NOSILK-KIT  [1X01NS-KIT]  32.42,77.92 0 top
JP344  M01NOSILK-KIT  [1X01NS-KIT]  29.88,77.92 0 top
JP345  M01NOSILK-KIT  [1X01NS-KIT]  34.96,77.92 0 top
JP346  M01NOSILK-KIT  [1X01NS-KIT]  45.12,77.92 0 top
JP347  M021X02_NO_SILK  [1X02_NO_SILK]  26.83,98.24 0 top
JP348  M021X02_NO_SILK  [1X02_NO_SILK]  26.83,95.7 0 top
JP349  M021X02_NO_SILK  [1X02_NO_SILK]  26.83,93.16 0 top
JP350  M021X02_NO_SILK  [1X02_NO_SILK]  26.83,90.62 0 top
JP351  MPU6050  [1X08_PIN1_NO_SILK]  69.61,85.54 180 top
JP352  M01NOSILK-KIT  [1X01NS-KIT]  72.66,80.46 0 top
JP353  M01NOSILK-KIT  [1X01NS-KIT]  72.66,90.62 0 top
JP354  M01NOSILK-KIT  [1X01NS-KIT]  72.66,88.08 0 top
JP355  M01NOSILK-KIT  [1X01NS-KIT]  72.66,85.54 0 top
JP356  M01NOSILK-KIT  [1X01NS-KIT]  72.66,93.16 0 top
JP357  M01NOSILK-KIT  [1X01NS-KIT]  56.91,98.24 0 top
JP358  M01NOSILK-KIT  [1X01NS-KIT]  56.91,95.7 0 top
JP359  M01NOSILK-KIT  [1X01NS-KIT]  56.91,93.16 0 top
JP360  M01NOSILK-KIT  [1X01NS-KIT]  56.91,90.62 0 top
JP361  M01NOSILK-KIT  [1X01NS-KIT]  72.66,95.7 0 top
JP362  M01NOSILK-KIT  [1X01NS-KIT]  67.58,77.92 0 top
JP363  M01NOSILK-KIT  [1X01NS-KIT]  72.66,83 0 top
JP364  M01NOSILK-KIT  [1X01NS-KIT]  51.83,88.08 90 top
JP365  M01NOSILK-KIT  [1X01NS-KIT]  54.37,88.08 90 top
JP366  M01NOSILK-KIT  [1X01NS-KIT]  59.45,88.08 90 top
JP367  M01NOSILK-KIT  [1X01NS-KIT]  56.91,88.08 90 top
JP368  M01NOSILK-KIT  [1X01NS-KIT]  57.42,77.92 0 top
JP369  M01NOSILK-KIT  [1X01NS-KIT]  54.88,77.92 0 top
JP370  M01NOSILK-KIT  [1X01NS-KIT]  59.96,77.92 0 top
JP371  M01NOSILK-KIT  [1X01NS-KIT]  70.12,77.92 0 top
JP372  M021X02_NO_SILK  [1X02_NO_SILK]  51.83,98.24 0 top
JP373  M021X02_NO_SILK  [1X02_NO_SILK]  51.83,95.7 0 top
JP374  M021X02_NO_SILK  [1X02_NO_SILK]  51.83,93.16 0 top
JP375  M021X02_NO_SILK  [1X02_NO_SILK]  51.83,90.62 0 top
JP376  MPU6050  [1X08_PIN1_NO_SILK]  94.61,85.54 180 top
JP377  M01NOSILK-KIT  [1X01NS-KIT]  97.66,80.46 0 top
JP378  M01NOSILK-KIT  [1X01NS-KIT]  97.66,90.62 0 top
JP379  M01NOSILK-KIT  [1X01NS-KIT]  97.66,88.08 0 top
JP380  M01NOSILK-KIT  [1X01NS-KIT]  97.66,85.54 0 top
JP381  M01NOSILK-KIT  [1X01NS-KIT]  97.66,93.16 0 top
JP382  M01NOSILK-KIT  [1X01NS-KIT]  81.91,98.24 0 top
JP383  M01NOSILK-KIT  [1X01NS-KIT]  81.91,95.7 0 top
JP384  M01NOSILK-KIT  [1X01NS-KIT]  81.91,93.16 0 top
JP385  M01NOSILK-KIT  [1X01NS-KIT]  81.91,90.62 0 top
JP386  M01NOSILK-KIT  [1X01NS-KIT]  97.66,95.7 0 top
JP387  M01NOSILK-KIT  [1X01NS-KIT]  92.58,77.92 0 top
JP388  M01NOSILK-KIT  [1X01NS-KIT]  97.66,83 0 top
JP389  M01NOSILK-KIT  [1X01NS-KIT]  76.83,88.08 90 top
JP390  M01NOSILK-KIT  [1X01NS-KIT]  79.37,88.08 90 top
JP391  M01NOSILK-KIT  [1X01NS-KIT]  84.45,88.08 90 top
JP392  M01NOSILK-KIT  [1X01NS-KIT]  81.91,88.08 90 top
JP393  M01NOSILK-KIT  [1X01NS-KIT]  82.42,77.92 0 top
JP394  M01NOSILK-KIT  [1X01NS-KIT]  79.88,77.92 0 top
JP395  M01NOSILK-KIT  [1X01NS-KIT]  84.96,77.92 0 top
JP396  M01NOSILK-KIT  [1X01NS-KIT]  95.12,77.92 0 top
JP397  M021X02_NO_SILK  [1X02_NO_SILK]  76.83,98.24 0 top
JP398  M021X02_NO_SILK  [1X02_NO_SILK]  76.83,95.7 0 top
JP399  M021X02_NO_SILK  [1X02_NO_SILK]  76.83,93.16 0 top
JP400  M021X02_NO_SILK  [1X02_NO_SILK]  76.83,90.62 0 top
LDO  MCP1703CB  [SOT23]  8.69,10.22 180 top
LDO1  MCP1703CB  [SOT23]  33.69,10.22 180 top
LDO2  MCP1703CB  [SOT23]  58.69,10.22 180 top
LDO3  MCP1703CB  [SOT23]  83.69,10.22 180 top
LDO4  MCP1703CB  [SOT23]  8.69,33.72 180 top
LDO5  MCP1703CB  [SOT23]  33.69,33.72 180 top
LDO6  MCP1703CB  [SOT23]  58.69,33.72 180 top
LDO7  MCP1703CB  [SOT23]  83.69,33.72 180 top
LDO8  MCP1703CB  [SOT23]  8.69,57.22 180 top
LDO9  MCP1703CB  [SOT23]  33.69,57.22 180 top
LDO10  MCP1703CB  [SOT23]  58.69,57.22 180 top
LDO11  MCP1703CB  [SOT23]  83.69,57.22 180 top
LDO12  MCP1703CB  [SOT23]  8.69,80.72 180 top
LDO13  MCP1703CB  [SOT23]  33.69,80.72 180 top
LDO14  MCP1703CB  [SOT23]  58.69,80.72 180 top
LDO15  MCP1703CB  [SOT23]  83.69,80.72 180 top
LOGO1  OSHW-LOGOS  [OSHW-LOGO-S]  2.09,7.93 0 bottom
LOGO2  OSHW-LOGOS  [OSHW-LOGO-S]  27.09,7.93 0 bottom
LOGO3  OSHW-LOGOS  [OSHW-LOGO-S]  52.09,7.93 0 bottom
LOGO4  OSHW-LOGOS  [OSHW-LOGO-S]  77.09,7.93 0 bottom
LOGO5  OSHW-LOGOS  [OSHW-LOGO-S]  2.09,31.43 0 bottom
LOGO6  OSHW-LOGOS  [OSHW-LOGO-S]  27.09,31.43 0 bottom
LOGO7  OSHW-LOGOS  [OSHW-LOGO-S]  52.09,31.43 0 bottom
LOGO8  OSHW-LOGOS  [OSHW-LOGO-S]  77.09,31.43 0 bottom
LOGO9  OSHW-LOGOS  [OSHW-LOGO-S]  2.09,54.93 0 bottom
LOGO10  OSHW-LOGOS  [OSHW-LOGO-S]  27.09,54.93 0 bottom
LOGO11  OSHW-LOGOS  [OSHW-LOGO-S]  52.09,54.93 0 bottom
LOGO12  OSHW-LOGOS  [OSHW-LOGO-S]  77.09,54.93 0 bottom
LOGO13  OSHW-LOGOS  [OSHW-LOGO-S]  2.09,78.43 0 bottom
LOGO14  OSHW-LOGOS  [OSHW-LOGO-S]  27.09,78.43 0 bottom
LOGO15  OSHW-LOGOS  [OSHW-LOGO-S]  52.09,78.43 0 bottom
LOGO16  OSHW-LOGOS  [OSHW-LOGO-S]  77.09,78.43 0 bottom
Q1  16MHz  [RESONATOR-SMD]  20.63,27.79 0 top
Q2  FET  [SOT323]  1.83,7.93 270 top
Q3  16MHz  [RESONATOR-SMD]  45.63,27.79 0 top
Q4  FET  [SOT323]  26.83,7.93 270 top
Q5  16MHz  [RESONATOR-SMD]  70.63,27.79 0 top
Q6  FET  [SOT323]  51.83,7.93 270 top
Q7  16MHz  [RESONATOR-SMD]  95.63,27.79 0 top
Q8  FET  [SOT323]  76.83,7.93 270 top
Q9  16MHz  [RESONATOR-SMD]  20.63,51.29 0 top
Q10  FET  [SOT323]  1.83,31.43 270 top
Q11  16MHz  [RESONATOR-SMD]  45.63,51.29 0 top
Q12  FET  [SOT323]  26.83,31.43 270 top
Q13  16MHz  [RESONATOR-SMD]  70.63,51.29 0 top
Q14  FET  [SOT323]  51.83,31.43 270 top
Q15  16MHz  [RESONATOR-SMD]  95.63,51.29 0 top
Q16  FET  [SOT323]  76.83,31.43 270 top
Q17  16MHz  [RESONATOR-SMD]  20.63,74.79 0 top
Q18  FET  [SOT323]  1.83,54.93 270 top
Q19  16MHz  [RESONATOR-SMD]  45.63,74.79 0 top
Q20  FET  [SOT323]  26.83,54.93 270 top
Q21  16MHz  [RESONATOR-SMD]  70.63,74.79 0 top
Q22  FET  [SOT323]  51.83,54.93 270 top
Q23  16MHz  [RESONATOR-SMD]  95.63,74.79 0 top
Q24  FET  [SOT323]  76.83,54.93 270 top
Q25  16MHz  [RESONATOR-SMD]  20.63,98.29 0 top
Q26  FET  [SOT323]  1.83,78.43 270 top
Q27  16MHz  [RESONATOR-SMD]  45.63,98.29 0 top
Q28  FET  [SOT323]  26.83,78.43 270 top
Q29  16MHz  [RESONATOR-SMD]  70.63,98.29 0 top
Q30  FET  [SOT323]  51.83,78.43 270 top
Q31  16MHz  [RESONATOR-SMD]  95.63,98.29 0 top
Q32  FET  [SOT323]  76.83,78.43 270 top
R1  1K  [0603-RES]  1.83,11.49 180 top
R2  10K  [0603-RES]  1.83,13.01 180 top
R3  Rchg  [0603-RES]  16.82,10.22 270 top
R4  1K  [0603-RES]  20.88,10.22 90 top
R5  1M  [0603-RES]  1.83,9.96 180 top
R6  1K  [0603-RES]  18.85,10.22 270 top
R7  10K  [0603-RES]  26.83,13.01 180 top
R8  1K  [0603-RES]  26.83,11.49 180 top
R9  Rchg  [0603-RES]  41.82,10.22 270 top
R10  1K  [0603-RES]  45.88,10.22 90 top
R11  1M  [0603-RES]  26.83,9.96 180 top
R12  1K  [0603-RES]  43.85,10.22 270 top
R13  10K  [0603-RES]  51.83,13.01 180 top
R14  1K  [0603-RES]  51.83,11.49 180 top
R15  Rchg  [0603-RES]  66.82,10.22 270 top
R16  1K  [0603-RES]  70.88,10.22 90 top
R17  1M  [0603-RES]  51.83,9.96 180 top
R18  1K  [0603-RES]  68.85,10.22 270 top
R19  10K  [0603-RES]  76.83,13.01 180 top
R20  1K  [0603-RES]  76.83,11.49 180 top
R21  Rchg  [0603-RES]  91.82,10.22 270 top
R22  1K  [0603-RES]  95.88,10.22 90 top
R23  1M  [0603-RES]  76.83,9.96 180 top
R24  1K  [0603-RES]  93.85,10.22 270 top
R25  10K  [0603-RES]  1.83,36.51 180 top
R26  1K  [0603-RES]  1.83,34.99 180 top
R27  Rchg  [0603-RES]  16.82,33.72 270 top
R28  1K  [0603-RES]  20.88,33.72 90 top
R29  1M  [0603-RES]  1.83,33.46 180 top
R30  1K  [0603-RES]  18.85,33.72 270 top
R31  10K  [0603-RES]  26.83,36.51 180 top
R32  1K  [0603-RES]  26.83,34.99 180 top
R33  Rchg  [0603-RES]  41.82,33.72 270 top
R34  1K  [0603-RES]  45.88,33.72 90 top
R35  1M  [0603-RES]  26.83,33.46 180 top
R36  1K  [0603-RES]  43.85,33.72 270 top
R37  10K  [0603-RES]  51.83,36.51 180 top
R38  1K  [0603-RES]  51.83,34.99 180 top
R39  Rchg  [0603-RES]  66.82,33.72 270 top
R40  1K  [0603-RES]  70.88,33.72 90 top
R41  1M  [0603-RES]  51.83,33.46 180 top
R42  1K  [0603-RES]  68.85,33.72 270 top
R43  10K  [0603-RES]  76.83,36.51 180 top
R44  1K  [0603-RES]  76.83,34.99 180 top
R45  Rchg  [0603-RES]  91.82,33.72 270 top
R46  1K  [0603-RES]  95.88,33.72 90 top
R47  1M  [0603-RES]  76.83,33.46 180 top
R48  1K  [0603-RES]  93.85,33.72 270 top
R49  10K  [0603-RES]  1.83,60.01 180 top
R50  1K  [0603-RES]  1.83,58.49 180 top
R51  Rchg  [0603-RES]  16.82,57.22 270 top
R52  1K  [0603-RES]  20.88,57.22 90 top
R53  1M  [0603-RES]  1.83,56.96 180 top
R54  1K  [0603-RES]  18.85,57.22 270 top
R55  10K  [0603-RES]  26.83,60.01 180 top
R56  1K  [0603-RES]  26.83,58.49 180 top
R57  Rchg  [0603-RES]  41.82,57.22 270 top
R58  1K  [0603-RES]  45.88,57.22 90 top
R59  1M  [0603-RES]  26.83,56.96 180 top
R60  1K  [0603-RES]  43.85,57.22 270 top
R61  10K  [0603-RES]  51.83,60.01 180 top
R62  1K  [0603-RES]  51.83,58.49 180 top
R63  Rchg  [0603-RES]  66.82,57.22 270 top
R64  1K  [0603-RES]  70.88,57.22 90 top
R65  1M  [0603-RES]  51.83,56.96 180 top
R66  1K  [0603-RES]  68.85,57.22 270 top
R67  10K  [0603-RES]  76.83,60.01 180 top
R68  1K  [0603-RES]  76.83,58.49 180 top
R69  Rchg  [0603-RES]  91.82,57.22 270 top
R70  1K  [0603-RES]  95.88,57.22 90 top
R71  1M  [0603-RES]  76.83,56.96 180 top
R72  1K  [0603-RES]  93.85,57.22 270 top
R73  10K  [0603-RES]  1.83,83.51 180 top
R74  1K  [0603-RES]  1.83,81.99 180 top
R75  Rchg  [0603-RES]  16.82,80.72 270 top
R76  1K  [0603-RES]  20.88,80.72 90 top
R77  1M  [0603-RES]  1.83,80.46 180 top
R78  1K  [0603-RES]  18.85,80.72 270 top
R79  10K  [0603-RES]  26.83,83.51 180 top
R80  1K  [0603-RES]  26.83,81.99 180 top
R81  Rchg  [0603-RES]  41.82,80.72 270 top
R82  1K  [0603-RES]  45.88,80.72 90 top
R83  1M  [0603-RES]  26.83,80.46 180 top
R84  1K  [0603-RES]  43.85,80.72 270 top
R85  10K  [0603-RES]  51.83,83.51 180 top
R86  1K  [0603-RES]  51.83,81.99 180 top
R87  Rchg  [0603-RES]  66.82,80.72 270 top
R88  1K  [0603-RES]  70.88,80.72 90 top
R89  1M  [0603-RES]  51.83,80.46 180 top
R90  1K  [0603-RES]  68.85,80.72 270 top
R91  10K  [0603-RES]  76.83,83.51 180 top
R92  1K  [0603-RES]  76.83,81.99 180 top
R93  Rchg  [0603-RES]  91.82,80.72 270 top
R94  1K  [0603-RES]  95.88,80.72 90 top
R95  1M  [0603-RES]  76.83,80.46 180 top
R96  1K  [0603-RES]  93.85,80.72 270 top
TP1  TEST-POINTTP_15TH_THRU  [TP_15TH]  17.33,28.25 270 top
TP2  TEST-POINTTP_15TH_THRU  [TP_15TH]  42.33,28.25 270 top
TP3  TEST-POINTTP_15TH_THRU  [TP_15TH]  39.79,28.25 270 top
TP4  TEST-POINTTP_15TH_THRU  [TP_15TH]  37.25,28.25 270 top
TP5  TEST-POINTTP_15TH_THRU  [TP_15TH]  34.71,28.25 270 top
TP6  TEST-POINTTP_15TH_THRU  [TP_15TH]  14.79,28.25 270 top
TP7  TEST-POINTTP_15TH_THRU  [TP_15TH]  12.25,28.25 270 top
TP8  TEST-POINTTP_15TH_THRU  [TP_15TH]  9.71,28.25 270 top
TP9  TEST-POINTTP_15TH_THRU  [TP_15TH]  67.33,28.25 270 top
TP10  TEST-POINTTP_15TH_THRU  [TP_15TH]  64.79,28.25 270 top
TP11  TEST-POINTTP_15TH_THRU  [TP_15TH]  62.25,28.25 270 top
TP12  TEST-POINTTP_15TH_THRU  [TP_15TH]  59.71,28.25 270 top
TP13  TEST-POINTTP_15TH_THRU  [TP_15TH]  92.33,28.25 270 top
TP14  TEST-POINTTP_15TH_THRU  [TP_15TH]  89.79,28.25 270 top
TP15  TEST-POINTTP_15TH_THRU  [TP_15TH]  87.25,28.25 270 top
TP16  TEST-POINTTP_15TH_THRU  [TP_15TH]  84.71,28.25 270 top
TP17  TEST-POINTTP_15TH_THRU  [TP_15TH]  17.33,51.75 270 top
TP18  TEST-POINTTP_15TH_THRU  [TP_15TH]  14.79,51.75 270 top
TP19  TEST-POINTTP_15TH_THRU  [TP_15TH]  12.25,51.75 270 top
TP20  TEST-POINTTP_15TH_THRU  [TP_15TH]  9.71,51.75 270 top
TP21  TEST-POINTTP_15TH_THRU  [TP_15TH]  42.33,51.75 270 top
TP22  TEST-POINTTP_15TH_THRU  [TP_15TH]  39.79,51.75 270 top
TP23  TEST-POINTTP_15TH_THRU  [TP_15TH]  37.25,51.75 270 top
TP24  TEST-POINTTP_15TH_THRU  [TP_15TH]  34.71,51.75 270 top
TP25  TEST-POINTTP_15TH_THRU  [TP_15TH]  67.33,51.75 270 top
TP26  TEST-POINTTP_15TH_THRU  [TP_15TH]  64.79,51.75 270 top
TP27  TEST-POINTTP_15TH_THRU  [TP_15TH]  62.25,51.75 270 top
TP28  TEST-POINTTP_15TH_THRU  [TP_15TH]  59.71,51.75 270 top
TP29  TEST-POINTTP_15TH_THRU  [TP_15TH]  92.33,51.75 270 top
TP30  TEST-POINTTP_15TH_THRU  [TP_15TH]  89.79,51.75 270 top
TP31  TEST-POINTTP_15TH_THRU  [TP_15TH]  87.25,51.75 270 top
TP32  TEST-POINTTP_15TH_THRU  [TP_15TH]  84.71,51.75 270 top
TP33  TEST-POINTTP_15TH_THRU  [TP_15TH]  17.33,75.25 270 top
TP34  TEST-POINTTP_15TH_THRU  [TP_15TH]  14.79,75.25 270 top
TP35  TEST-POINTTP_15TH_THRU  [TP_15TH]  12.25,75.25 270 top
TP36  TEST-POINTTP_15TH_THRU  [TP_15TH]  9.71,75.25 270 top
TP37  TEST-POINTTP_15TH_THRU  [TP_15TH]  42.33,75.25 270 top
TP38  TEST-POINTTP_15TH_THRU  [TP_15TH]  39.79,75.25 270 top
TP39  TEST-POINTTP_15TH_THRU  [TP_15TH]  37.25,75.25 270 top
TP40  TEST-POINTTP_15TH_THRU  [TP_15TH]  34.71,75.25 270 top
TP41  TEST-POINTTP_15TH_THRU  [TP_15TH]  67.33,75.25 270 top
TP42  TEST-POINTTP_15TH_THRU  [TP_15TH]  64.79,75.25 270 top
TP43  TEST-POINTTP_15TH_THRU  [TP_15TH]  62.25,75.25 270 top
TP44  TEST-POINTTP_15TH_THRU  [TP_15TH]  59.71,75.25 270 top
TP45  TEST-POINTTP_15TH_THRU  [TP_15TH]  92.33,75.25 270 top
TP46  TEST-POINTTP_15TH_THRU  [TP_15TH]  89.79,75.25 270 top
TP47  TEST-POINTTP_15TH_THRU  [TP_15TH]  87.25,75.25 270 top
TP48  TEST-POINTTP_15TH_THRU  [TP_15TH]  84.71,75.25 270 top
TP49  TEST-POINTTP_15TH_THRU  [TP_15TH]  17.33,98.75 270 top
TP50  TEST-POINTTP_15TH_THRU  [TP_15TH]  14.79,98.75 270 top
TP51  TEST-POINTTP_15TH_THRU  [TP_15TH]  12.25,98.75 270 top
TP52  TEST-POINTTP_15TH_THRU  [TP_15TH]  9.71,98.75 270 top
TP53  TEST-POINTTP_15TH_THRU  [TP_15TH]  42.33,98.75 270 top
TP54  TEST-POINTTP_15TH_THRU  [TP_15TH]  39.79,98.75 270 top
TP55  TEST-POINTTP_15TH_THRU  [TP_15TH]  37.25,98.75 270 top
TP56  TEST-POINTTP_15TH_THRU  [TP_15TH]  34.71,98.75 270 top
TP57  TEST-POINTTP_15TH_THRU  [TP_15TH]  67.33,98.75 270 top
TP58  TEST-POINTTP_15TH_THRU  [TP_15TH]  64.79,98.75 270 top
TP59  TEST-POINTTP_15TH_THRU  [TP_15TH]  62.25,98.75 270 top
TP60  TEST-POINTTP_15TH_THRU  [TP_15TH]  59.71,98.75 270 top
TP61  TEST-POINTTP_15TH_THRU  [TP_15TH]  92.33,98.75 270 top
TP62  TEST-POINTTP_15TH_THRU  [TP_15TH]  89.79,98.75 270 top
TP63  TEST-POINTTP_15TH_THRU  [TP_15TH]  87.25,98.75 270 top
TP64  TEST-POINTTP_15TH_THRU  [TP_15TH]  84.71,98.75 270 top
U1  MCP73831  [SOT23-5]  39.02,9.96 180 top
U2  MCP73831  [SOT23-5]  14.02,9.96 180 top
U3  MCP73831  [SOT23-5]  64.02,9.96 180 top
U4  MCP73831  [SOT23-5]  89.02,9.96 180 top
U5  MCP73831  [SOT23-5]  14.02,33.46 180 top
U6  MCP73831  [SOT23-5]  39.02,33.46 180 top
U7  MCP73831  [SOT23-5]  64.02,33.46 180 top
U8  MCP73831  [SOT23-5]  89.02,33.46 180 top
U9  MCP73831  [SOT23-5]  14.02,56.96 180 top
U10  MCP73831  [SOT23-5]  39.02,56.96 180 top
U11  MCP73831  [SOT23-5]  64.02,56.96 180 top
U12  MCP73831  [SOT23-5]  89.02,56.96 180 top
U13  MCP73831  [SOT23-5]  14.02,80.46 180 top
U14  MCP73831  [SOT23-5]  39.02,80.46 180 top
U15  MCP73831  [SOT23-5]  64.02,80.46 180 top
U16  MCP73831  [SOT23-5]  89.02,80.46 180 top

## Library data of the parts
AVR AVR1-AVR15 = SparkFun-DigitalIC; PROD_ID: IC-09069
C1-C3 C7-C10 C12 C15-C17 C19 C22-C24 C26 C29-C31 C33 C36-C38 C40 C43-C45 C47 C50-C52 C54 C57-C59 C61 C64-C66 C68 C71-C73 C75 C78-C80 C82 C85-C87 C89 C92-C94 C96 C99-C101 C103 C106-C108 C110 D1-D16 Q1 Q3 Q5 Q7 Q9 Q11 Q13 Q15 Q17 Q19 Q21 Q23 Q25 Q27 Q29 Q31 U1-U16 = SparkFun
C4-C6 C11 C13 C14 C18 C20 C21 C25 C27 C28 C32 C34 C35 C39 C41 C42 C46 C48 C49 C53 C55 C56 C60 C62 C63 C67 C69 C70 C74 C76 C77 C81 C83 C84 C88 C90 C91 C95 C97 C98 C102 C104 C105 C109 C111 C112 = SparkFun-Capacitors; PROD_ID: CAP-08280
JP1-JP400 = SparkFun-Connectors
LDO LDO1-LDO15 = linear
LOGO1-LOGO16 = SparkFun-Aesthetics
Q2 Q4 Q6 Q8 Q10 Q12 Q14 Q16 Q18 Q20 Q22 Q24 Q26 Q28 Q30 Q32 = SparkFun-DiscreteSemi; PROD_ID: TRANS-11151
R1-R96 = SparkFun-Resistors
TP1-TP64 = SparkFun-Passives